# Altium PCB TIDA-00641_PCB.PcbDoc
Units mil, origin at the board's own origin, x right, y up, seen from the top; angles counter-clockwise.
Board outline 1800 x 1950 mil, 2 copper layers (Top Layer, Bottom Layer), stack 62 mil thick; 47 components, 47 nets, 167 pads, 110 vias.
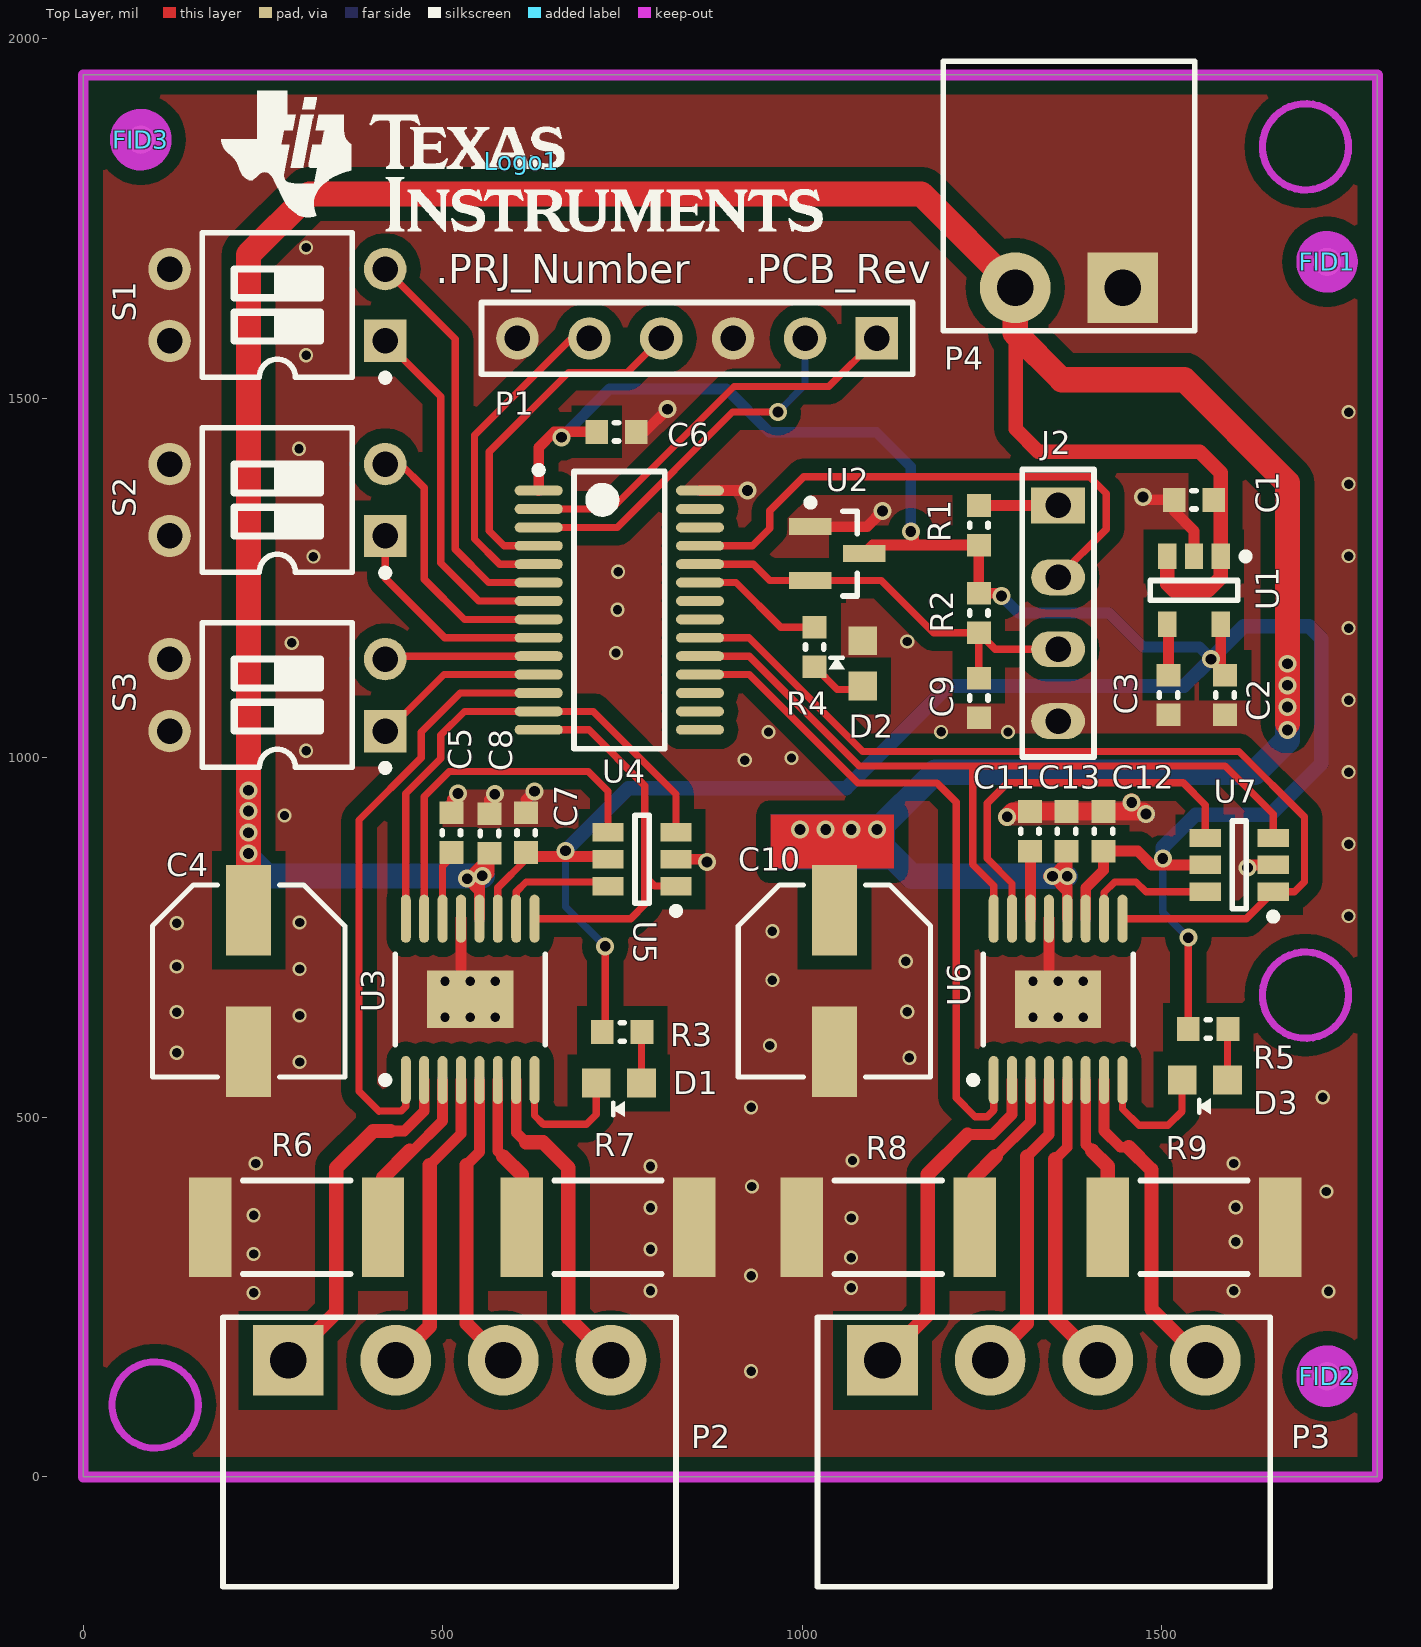
[diagram p0: Top Layer view]
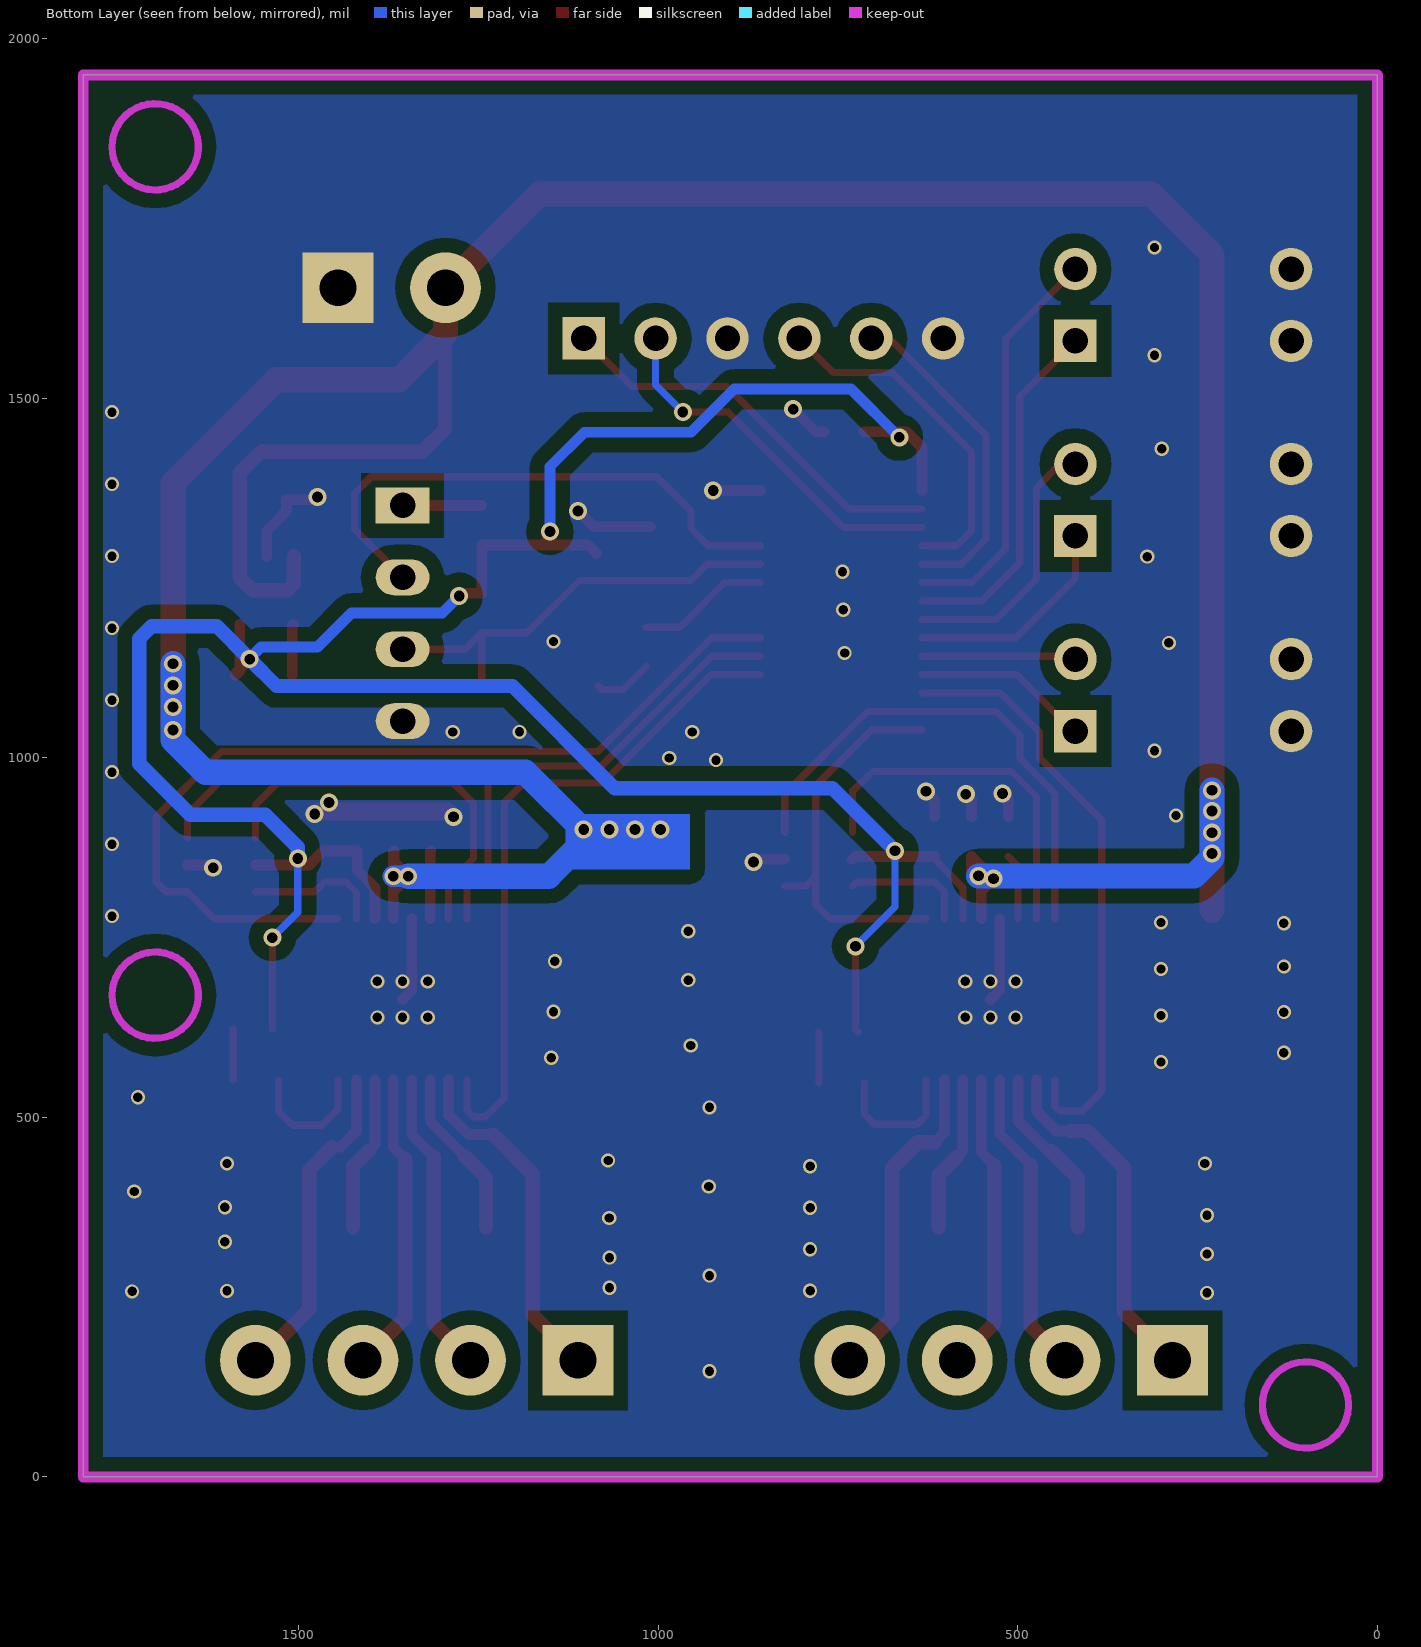
[diagram p1: Bottom Layer view, seen from below]

## Layer stack, top to bottom
Top Solder: solder mask 0.4, Solder Resist, Dk 3.5
Top Layer: signal copper 1.4
Dielectric1: core 59.2, FR-4, Dk 4.8
Bottom Layer: signal copper 1.4
Bottom Solder: solder mask 0.4, Solder Resist, Dk 3.5

## Board outline
0,0 1800,0 1800,1950 0,1950

## Design rules (kind name [scope] priority, off if disabled: settings)
AcuteAngle [All] p1: minimum=4.50000000000000E+0001 checktracksonly=FALSE
AssemblyTestPointUsage [All] p1: valid=2
Clearance Clearance_Keepouts [((IsTrack Or IsArc) And Not InPoly) And IsFree and IsKeepOut vs ((IsTrack Or IsArc) And Not InPoly) And IsFree and IsKeepOut] p1: gap=0
Clearance Clearance_BoardEdge_MountingHoles [OnCopper and InComponentClass('Mounting Holes') vs IsKeepOut] p2: gap=40
Clearance Clearance_BoardEdge_Poly [OnCopper and InPoly vs IsKeepOut] p3: gap=20
Clearance Clearance_BoardEdge [OnCopper and Not InComponentClass('Logo') and not InComponentClass('FiducialMark') and not InRegion(1000,500,4000,800) and Not IsKeepout vs IsKeepOut] p4: gap=20
Clearance Clearance_Poly [InPolygon] p5: gap=20
Clearance [All] p6: gap=8
ComponentClearance ComponentClearance_MountingHoles_FiducialMarks [InComponentClass('Mounting Holes') vs InComponentClass('FiducialMark')] p1 off: gap=50 collisioncheckmode=3 verticalgap=10 showdistances=FALSE
ComponentClearance ComponentClearance_Shunt [InComponentClass('Header') vs InComponentClass('Shunt')] p2 off: gap=0 collisioncheckmode=3 verticalgap=0 showdistances=FALSE
ComponentClearance ComponentClearance_Logo [InComponentClass('Logo')] p3 off: gap=50 collisioncheckmode=3 verticalgap=10 showdistances=FALSE
ComponentClearance ComponentClearance_ScrewToNut [(HasFootprint('NY PMS 440 0025 PH')) vs (HasFootprint('Keystone_1902C'))] p4 off: gap=5 collisioncheckmode=3 verticalgap=10 showdistances=FALSE
ComponentClearance ComponentClearance_MountingHoles [InComponentClass('Mounting Holes')] p5 off: gap=250 collisioncheckmode=3 verticalgap=100000 showdistances=FALSE
ComponentClearance ComponentClearance_SmallPassives [HasFootprint('0201*') or HasFootprint('0402*') or HasFootprint('0508') or HasFootprint('0603*') or HasFootprint('0612') or HasFootprint('0805*') or HasFootprint('0815*') or HasFootprint('0830*') or HasFootprint('1206*') or HasFootprint('1210*') or HasFootprint('1808*') or HasFootprint('1812*') or HasFootprint('1825*') or HasFootprint('2010*') or HasFootprint('2220*') or HasFootprint('2225*') or HasFootprint('2512*') or HasFootprint('2728*') or HasFootprint('3518*') vs HasFootprint('0201*') or HasFootprint('0402*') or HasFootprint('0508') or HasFootprint('0603*') or HasFootprint('0612') or HasFootprint('0805*') or HasFootprint('0815*') or HasFootprint('0830*') or HasFootprint('1206*') or HasFootprint('1210*') or HasFootprint('1808*') or HasFootprint('1812*') or HasFootprint('1825*') or HasFootprint('2010*') or HasFootprint('2220*') or HasFootprint('2225*') or HasFootprint('2512*') or HasFootprint('2728*') or HasFootprint('3518*')] p6 off: gap=20 collisioncheckmode=3 verticalgap=10 showdistances=FALSE
ComponentClearance ComponentClearance_THtoSMT [IsThruComponent vs IsSMTComponent] p7 off: gap=100 collisioncheckmode=3 verticalgap=30 showdistances=FALSE
ComponentClearance ComponentClearance_THtoTH [IsThruComponent vs IsThruComponent] p8 off: gap=118.11 collisioncheckmode=3 verticalgap=30 showdistances=FALSE
ComponentClearance [All] p9 off: gap=0 collisioncheckmode=3 verticalgap=10 showdistances=FALSE
DiffPairsRouting [All] p1: maxlimit=100 minlimit=10 mostfreqgap=10 toplayer_minwidth=15 toplayer_maxwidth=15 toplayer_prefwidth=15 bottomlayer_minwidth=15 bottomlayer_maxwidth=15 bottomlayer_prefwidth=15 maxuncoupledlength=1000
FabricationTestPointUsage TestPointUsage [All] p1: valid=2 allowmultiple=FALSE
FabricationTestpoint Testpoint [All] p1: side=3 testpointundercomponent=TRUE minsize=40 maxsize=100 preferedsize=60 minholesize=0 maxholesize=40 preferedholesize=32 testpointgrid=1 allowsidetop=TRUE allowsidebottom=TRUE usegrid=TRUE gridtolerance=0.01
FanoutControl Fanout_LCC [IsLCC] p1: bgadir=Out bgaviamode=Centered fanoutstyle=Auto fanoutdirection=Alternating viagrid=1 // Fanout_LCC (Default Rule)
FanoutControl Fanout_BGA [IsBGA] p2: bgadir=Out bgaviamode=Centered fanoutstyle=Auto fanoutdirection=Alternating viagrid=1 // Fanout_BGA (Default Rule)
FanoutControl Fanout_Default [All] p4: bgadir=Out bgaviamode=Centered fanoutstyle=Auto fanoutdirection=Alternating viagrid=1 // Fanout_Default (Default Rule)
FanoutControl Fanout_Small [(CompPinCount < 5)] p5: bgadir=Out bgaviamode=Centered fanoutstyle=Auto fanoutdirection=OutThenIn viagrid=1 // Fanout_Small (Default Rule)
HoleSize [All] p1: absolutevalues=TRUE maxlimit=251 minlimit=8 maxpercent=80.000 minpercent=20.000
MinimumAnnularRing MinimumAnnularRing_ThermalPadVias [IsVia and InAnyComponent] p1: minimumring=5.91
MinimumAnnularRing [All] p2: minimumring=9
PlaneConnect [All] p1: planeconnectstyle=Relief reliefexpansion=10 reliefentries=4 reliefconductorwidth=10 reliefairgap=10
PolygonConnect [All] p1: connectstyle=Direct reliefconductorwidth=10 reliefentries=4 polygonreliefangle="90 Angle" airgapwidth=10
RoutingVias ThermalPadVias [IsVia and InAnyComponent] p1 off: holewidth=7.87 width=19.68 viastyle="Through Hole" minholewidth=7.87 minwidth=19.68 maxholewidth=12.99 maxwidth=23.62
RoutingVias [All] p2 off: holewidth=16 width=34 viastyle="Through Hole" minholewidth=7.87 minwidth=26 maxholewidth=40 maxwidth=65
SilkToBoardRegionClearance [Not ((IsComment or IsDesignator) And (Hide <> 'False')) and not InRegion(1000,500,4000,800)] p1:
SilkToSilkClearance SilkToSilkClearance_Pb-FreeLogo [(HasFootprint('Pb-Free_Overlay_Medium') OR HasFootprint('Pb-Free_Overlay_Small')) vs (HasFootprint('Pb-Free_Overlay_Medium') OR HasFootprint('Pb-Free_Overlay_Small'))] p1: silktosilkclearance=0
SilkToSilkClearance [All] p2: silktosilkclearance=4
SolderMaskExpansion [All] p1: expansion=1.97
UnpouredPolygon [All] p1: allowunpoured=FALSE
Width [All] p1: maxlimit=100 minlimit=6 preferedwidth=10 checkconnectedcopper=TRUE
16 further rules are at their usual default settings.

## Classes and differential pairs
component class Logo: Logo1
component class TIDA-00641_TID_Hardware: FID1 FID2 FID3 Logo1 ZZ2 ZZ3 ZZ4
component class FiducialMark: FID1 FID2 FID3
component class AssemblyNote: ZZ2 ZZ3 ZZ4
component class Header: J2
component class TIDA-00641_BlankSheet: C1 C2 C3 C4 C5 C6 C7 C8 C9 C10 C11 C12 C13 D1 D2 D3 J2 P1 P2 P3 P4 R1 R2 R3 R4 R5 R6 R7 R8 R9 S1 S2 S3 U1 U2 U3 U4 U5 U6 U7

## Components (designator, comment, footprint, x,y, rotation, side; value= is the part's Value field where it differs from the comment)
C1 "C0603C105K4PACTU" 0603L 1544.88,1359.06 r180 top
C2 "C0603C225K8PACTU" 0603L 1588.19,1087.4 r90 top
C3 "C0603C103J5RACTU" 0603L 1509.45,1087.4 r270 top
C4 "EEE-FK1E470P" SM_RADIAL_D 229.92,689.76 r270 top
C5 "C0603C225M8PACTU" 0603L 512,896 r90 top
C6 "C0603C104K4RACTU" 0603L 741.73,1453.54 r180 top
C7 "06033C104KAT2A" 0603L 616,896 r270 top
C8 "06033C104KAT2A" 0603L 565,895 r270 top
C9 "C0603C102K5RACTU" 0603L 1245.67,1083.46 r90 top
C10 "EEE-FK1E470P" SM_RADIAL_D 1044.88,689.76 r270 top
C11 "C0603C225K8PACTU" 0603L 1316.54,897.93 r90 top
C12 "06033C104KAT2A" 0603L 1418.9,897.93 r270 top
C13 "06033C104KAT2A" 0603L 1367.72,897.93 r270 top
D1 "LTST-C190KRKT" LED603RED 745.67,548.03 r0 top
D2 "LTST-C190GKT" LED603GRN 1084.25,1130.71 r270 top
D3 "LTST-C190KRKT" LED603RED 1560.63,551.97 r0 top
FID1 "Fiducial" Fiducial10-20 1730,1690 r0 top
FID2 "Fiducial" Fiducial10-20 1730,140 r0 top
FID3 "Fiducial" Fiducial10-20 80,1860 r0 top
J2 "TSW-104-07-G-S" HDR1X4 1355.91,1351.18 r270 top
Logo1 "Texas Instruments" TI_Stacked_Overlay_Small 610,1830 r0 top
P1 "Header 6" HDR1X6 1103.94,1583.46 r180 top
P2 "Header 4" J4-3.81 509.45,162.2 r0 top
P3 "Header 4" J4-3.81 1336.22,162.2 r0 top
P4 "Header 2" j2-3.81 1371,1654 r180 top
R1 "ERJ-3GEY0R00V" 0603L 1245.67,1323.62 r90 top
R2 "CRCW060347K0JNEA" 0603L 1245.67,1201.57 r270 top
R3 "RC0603FR-07390RL" 0603L 749.61,618.9 r180 top
R4 "RC0603FR-07390RL" 0603L 1017.32,1154.33 r90 top
R5 "RC0603FR-07390RL" 0603L 1564.57,622.83 r180 top
R6 "CSRN2512FKR250" 2512M 296.85,347.24 r0 top
R7 "CSRN2512FKR250" 2512M 729.92,347.24 r180 top
R8 "CSRN2512FKR250" 2512M 1119.68,347.24 r0 top
R9 "CSRN2512FKR250" 2512M 1544.88,347.24 r180 top
S1 "SW DIP-2" DIP-4 270,1630 r180 top
S2 "SW DIP-2" DIP-4 270,1358.7 r180 top
S3 "SW DIP-2" DIP-4 270,1087.4 r180 top
U1 "LP2985-33DBVT" MF05A_L 1544.88,1233.07 r270 top
U2 "TLV803S" SOT-23 1048.82,1284.25 r0 top
U3 "DRV8848" PW0016S 538.19,664.17 r90 top
U4 "MSP430G2553IPW28" PW0028A_N 745.67,1205.51 r0 top
U5 "SN74LVC2G14" DBV0006A_N 777.17,859.06 r180 top
U6 "DRV8848" PW0016S 1355.91,664.17 r90 top
U7 "SN74LVC2G14" DBV0006A_N 1607.87,851.18 r180 top
ZZ2 "These assemblies are ESD sensitive, ESD precautions shall be observed." AssemblyNote 185,3829.11 r0 top
ZZ3 "These assemblies must be clean and free from flux and all contaminants. Use of no clean flux is not acceptable." AssemblyNote 185,3740.56 r0 top
ZZ4 "These assemblies must comply with workmanship standards IPC-A-610 Class 2, unless otherwise specified." AssemblyNote 185,3652 r0 top

## Footprints (in the part's own frame and the unit in brackets; to place one, negate y for a bottom-side part, rotate by r counter-clockwise, add the part's x,y. Pads: shape width x height; smd on the part's side, far side on the other; paste and mask are expansions set on the pad)
0603L [mm] "0603 from SM-752 data"
  rect 0.8x0.85 smd: 1(-0.7,0) 2(0.7,0)
  silkscreen extent -0.07,-0.33 0.07,0.33, body extent -0.87,-0.47 0.87,0.47, height 0.85
2512M [mm] "Chip Resistor, Body 6.3x3.2mm, IPC Low Density"
  rect 1.5x3.5 smd: 1(-3.05,0) 2(3.05,0)
  silkscreen extent -1.9,-1.65 1.9,1.65, body extent -3.22,-1.67 3.22,1.67, height 0.71
AssemblyNote [mil] "Assembly Note"
DBV0006A_N [mm] "SOT23, 6-Leads, Body 2.9x1.6mm, Pitch 0.95mm, Lead Span 2.8mm, IPC Medium Density"
  rect 1.1x0.65 smd: 1(-1.2,0.95) 2(-1.2,0) 3(-1.2,-0.95) 4(1.2,-0.95) 5(1.2,0) 6(1.2,0.95)
  silkscreen extent -1.33,-1.55 0.25,1.95, body extent -0.87,-1.52 0.87,1.53, height 1.45
DIP-4 [mm] "DIP; 4 Leads; Row Spacing 7.62 mm; Pitch 2.54 mm"
  rect 1.5x1.5 hole 0.9: 1(-3.81,1.27)
  round 1.5 hole 0.9: 2(-3.81,-1.27) 3(3.81,-1.27) 4(3.81,1.27)
  silkscreen extent -3.94,-2.55 2.65,2.69, body extent -3.15,-2.5 3.15,2.5, height 5.6
Fiducial10-20 [mm]
  round 1 smd mask+0.5: 1(0,0)
  Top Layer keep-out circle w1.178: c0,0 r0.5
HDR1X4 [mm] "Connector; Header; 4 Position"
  rect 1.27x1.9 hole 0.9: 1(0,0)
  oval 1.27x1.9 hole 0.9: 2(2.54,0) 3(5.08,0) 4(7.62,0)
  silkscreen extent -1.27,-1.27 8.89,1.27
HDR1X6 [mm] "Connector; Header; 6 Position"
  rect 1.5x1.5 hole 0.9: 1(0,0)
  round 1.5 hole 0.9: 2(2.54,0) 3(5.08,0) 4(7.62,0) 5(10.16,0) 6(12.7,0)
  silkscreen extent -1.27,-1.27 13.97,1.27
j2-3.81 [mm] "Connector; Header; 4 Position"
  rect 2.5x2.5 hole 1.3: 1(-1.9,0)
  round 2.5 hole 1.3: 2(1.9,0)
  silkscreen extent -4.44,-8 4.45,1.52
J4-3.81 [mm] "Connector; Header; 4 Position"
  rect 2.5x2.5 hole 1.3: 1(-5.7,0)
  round 2.5 hole 1.3: 2(-1.9,0) 3(1.9,0) 4(5.7,0)
  silkscreen extent -8,-8 8,1.52
LED603GRN [mil]
  rect 40x40 smd: 1(-32.2,-0.1) 2(30.8,-0.1)
  silkscreen extent -10,-47 7,-25, body extent -26,-29 26,29, height 43
LED603RED [mil]
  rect 40x40 smd: 1(-32.2,-0.1) 2(30.8,-0.1)
  silkscreen extent -10,-47 7,-25, body extent -26,-29 26,29, height 43
MF05A_L [mm] "SOT23, 5-Leads, Body 2.9x1.6mm, Pitch 0.95mm, Lead Span 2.8mm, IPC High Density"
  rect 0.9x0.65 smd: 1(-1.2,0.95) 2(-1.2,0) 3(-1.2,-0.95) 4(1.2,-0.95) 5(1.2,0.95)
  silkscreen extent -1.32,-1.55 0.35,1.95, body extent -0.9,-1.55 0.9,1.55, height 1.19
PW0016S [mm]
  oval 1.7x0.35 smd: 1(-2.85,2.275) 2(-2.85,1.625) 3(-2.85,0.975) 4(-2.85,0.325) 5(-2.85,-0.325) 6(-2.85,-0.975) 7(-2.85,-1.625) 8(-2.85,-2.275) 9(2.85,-2.275) 10(2.85,-1.625) 11(2.85,-0.975) 12(2.85,-0.325) 13(2.85,0.325) 14(2.85,0.975) 15(2.85,1.625) 16(2.85,2.275)
  rect 2.032x3.048 smd: 17(0,0)
  silkscreen extent -2.97,-2.65 1.6,3.12, body extent -3.21,-2.5 3.21,2.5, height 0.99
PW0028A_N [mm] "TSOP, 28-Leads, Body 9.7x4.4mm, Pitch 0.65mm, IPC Medium Density"
  oval 1.7x0.35 smd: 1(-2.85,4.225) 2(-2.85,3.575) 3(-2.85,2.925) 4(-2.85,2.275) 5(-2.85,1.625) 6(-2.85,0.975) 7(-2.85,0.325) 8(-2.85,-0.325) 9(-2.85,-0.975) 10(-2.85,-1.625) 11(-2.85,-2.275) 12(-2.85,-2.925) 13(-2.85,-3.575) 14(-2.85,-4.225) 15(2.85,-4.225) 16(2.85,-3.575) 17(2.85,-2.925) 18(2.85,-2.275) 19(2.85,-1.625) 20(2.85,-0.975) 21(2.85,-0.325) 22(2.85,0.325) 23(2.85,0.975) 24(2.85,1.625) 25(2.85,2.275) 26(2.85,2.925) 27(2.85,3.575) 28(2.85,4.225)
  silkscreen extent -2.97,-4.9 1.6,5.07, body extent -2.25,-4.9 2.25,4.9, height 1.2
SM_RADIAL_D [mm] "6.3 x 5.8mm:  Panasonic D"
  rect 3.2x1.6 smd: 1(-2.5,0) 2(2.5,0)
  silkscreen extent -3.4,-3.4 3.4,3.4, body extent -3.41,-3.41 3.41,3.41, height 6.1
SOT-23 [mm] "SOT23, 3-Leads, Body 2.9x1.3mm, Pitch 0.95mm, Lead Span 2.5mm, IPC Medium Density"
  rect 1.5x0.6 smd: 1(-0.95,0.95) 2(-0.95,-0.95) 3(0.95,0)
  silkscreen extent -1.07,-1.5 0.7,1.92, body extent -1.16,-1.45 1.21,1.45, height 1
TI_Stacked_Overlay_Small [mil]
  silkscreen extent -418,-98 418,98

## Part data
C1: "CAP, CERM, 1uF, 16V, +/-10%, X5R, 0603"
C2 C11: "CAP, CERM, 2.2uF, 10V, +/-10%, X5R, 0603"
C3: "CAP, CERM, 0.01uF, 50V, +/-5%, X7R, 0603"
C4 C10: "CAP, AL, 47uF, 25V, +/-20%, 0.36 ohm, SMD"
C5: "CAP, CERM, 2.2uF, 10V, +/-20%, X5R, 0603"
C6: "CAP, CERM, 0.1uF, 16V, +/-10%, X7R, 0603"
C7 C8 C12 C13: "CAP, CERM, 0.1uF, 25V, +/-10%, X7R, 0603"
C9: "CAP, CERM, 1000pF, 50V, +/-10%, X7R, 0603"
D1 D3: library part D_LED_603_GRN, "LED SUPER RED CLEAR 0603 SMD"
D2: library part D_LED_603_GRN, "Diode, LED, Green, 2.1-V, 20-mA, 6-mcd"
FID1 FID2 FID3: "Fiducial mark.  There is nothing to buy or mount."
J2: "Header, TH, 100mil, 4x1, Gold plated, 230 mil above insulator"
Logo1: library part TI_Logo, "Texas Instrument Corporate Signature"
P1: "Header, 6-Pin"
P2 P3: "Header, 4-Pin"
P4: "Header, 2-Pin"
R1: "RES, 0 ohm, 5%, 0.1W, 0603"
R2: "RES, 47k ohm, 5%, 0.1W, 0603"
R3 R4 R5: "RES, 390 ohm, 1%, 0.1W, 0603"
R6 R7 R8 R9: "RES, 0.25 ohm, 1%, 2W, 2512"
S1 S2 S3: "SWITCH TIN CONT 2 SEC 50V"
U1: library part LP2985IM5-3.3, "Micropower 150 mA Low-Noise Ultra Low-Dropout Regulator, 5-pin SOT-23"
U2: library part TLV803DBZ, "IC VOLT SUPERVISR 2.93V SOT23-3"
U3 U6: library part DRV8848PWP, "IC MOTOR DRIVER PAR 16HTSSOP"
U4: "IC MCU 16BIT 16KB FLASH 28TSSOP"
U5 U7: "Dual Schmitt-Trigger Inverter"
ZZ2 ZZ3 ZZ4: library part AssemblyNote

## Via types
v1: diameter 19.68, hole 13, Top Layer to Bottom Layer, 73 vias
v2: diameter 25, hole 15, Top Layer to Bottom Layer, 37 vias

## Nets (pads, with @x,y where several pads share a name; then routed paths per layer and width w, separated by ;. In a path a pad name is that pad's centre, name@x,y a point inside that pad or via, vN(x,y) a via of type N, cw(c..) or ccw(c..) an arc to the next point about the centre after c; other vN are vias at no path point)
DIR1: P1.2 U4.3 | length 517.1
  Top Layer w10: U4.3 742.72,1320.67 903.15,1481.1 v2(966.14,1481.1)
  Bottom Layer w10: v2(966.14,1481.1) 1003.94,1518.9 P1.2
DIR2: P1.5 U4.5 | length 463.6
  Top Layer w10: U4.5 579.33,1269.49 544.21,1304.61 544.21,1448.94 678.74,1583.46 P1.5
DRV1-AIN1-TA11: U3.16 U4.13 U5.3 | length 717.3
  Top Layer w10: U3.16 448.62,950.46 497.28,999.11 497.28,1031.92 530.12,1064.76 U4.13 709.25,1064.76 824.41,949.61 U5.3
DRV1-AIN2: U3.15 U5.4 | length 508.5
  Top Layer w10: U3.15 474.21,946.23 509.09,981.1 702.36,981.1 729.92,953.54 U5.4
DRV1-AOUT1: P2.1 U3.2 | length 493.5
  Top Layer w15: 427.36,481.1 446.46,481.1 474.21,508.86 U3.2
  Top Layer w20: P2.1 351.97,229.13 351.97,429.92 403.15,481.1 427.36,481.1
DRV1-AOUT2: P2.2 U3.4 | length 427.4
  Top Layer w15: 481.89,433.86 525.39,477.36 U3.4
  Top Layer w20: P2.2 481.89,209.45 481.89,433.86
DRV1-BIN1-TA12: U3.9 U4.14 U5.1 | length 555.7
  Top Layer w10: U3.9 761.42,776.38 781.1,796.06 781.1,835.43 ; U4.14 703.35,1039.17 781.1,961.42 781.1,835.43 ; U5.1 794.88,821.65 781.1,835.43
DRV1-BIN2: U3.10 U5.6 | length 173.4
  Top Layer w10: U3.10 602.17,813.98 615.75,827.56 724.02,827.56 U5.6
DRV1-BOUT1: P2.4 U3.7 | length 458.2
  Top Layer w15: U3.7 602.17,478.94 615.75,465.35
  Top Layer w20: 615.75,465.35 639.37,465.35 674.8,429.92 674.8,221.26 P2.4
DRV1-BOUT2: P2.3 U3.5 | length 418.4
  Top Layer w15: 533.07,433.86 550.98,451.77 U3.5
  Top Layer w20: 533.07,433.86 533.07,213.39 P2.3
DRV1-NSLEEP: U3.1 U4.12 | length 837.7
  Top Layer w10: U3.1 448.62,515.09 442.36,508.82 411.38,508.82 411.22,508.66 383.46,536.42 383.46,913.58 470.08,1000.2 470.08,1036.22 524.21,1090.35 U4.12
DRV2-AIN1-TA01: U4.19 U6.16 U7.3 | length 1146.5
  Top Layer w10: U4.19 926.24,1141.54 1078.8,988.98 1588.19,988.98 1655.12,922.05 U7.3 ; 1237.8,988.98 1237.26,988.44 1237.26,851.72 1266.34,822.64 U6.16
DRV2-AIN2: U6.15 U7.4 | length 548.8
  Top Layer w10: U6.15 1291.93,825.33 1257.26,860 1257.26,936.85 1285.76,965.35 1529.98,965.35 1560.63,934.71 U7.4
DRV2-AOUT1: P3.1 U6.2 | length 484.5
  Top Layer w15: 1229.92,476.18 1264.25,476.18 1291.93,503.86 U6.2
  Top Layer w20: P3.1 1174.8,225.2 1174.8,421.06 1229.92,476.18
DRV2-AOUT2: P3.2 U6.4 | length 423.6
  Top Layer w15: 1312.6,445.67 1343.11,476.18 U6.4
  Top Layer w20: P3.2 1312.6,213.39 1312.6,445.67
DRV2-BIN1-TA02: U4.20 U6.9 U7.1 | length 1308.4
  Top Layer w10: U4.20 926.1,1167.13 1084.25,1008.98 1607.56,1008.98 1698.43,918.11 1698.43,827.56 1684.65,813.78 U7.1 1617.72,776.38 U6.9
DRV2-BIN2: U6.10 U7.6 | length 189
  Top Layer w10: U6.10 1419.88,812.8 1434.65,827.56 1464.37,827.56 1478.15,813.78 U7.6
DRV2-BOUT1: P3.4 U6.7 | length 457.3
  Top Layer w15: U6.7 1419.88,481.1 1442.52,458.46 1454.33,458.46
  Top Layer w20: 1454.33,458.46 1485.83,426.97 1485.83,233.07 1556.69,162.2 P3.4
DRV2-BOUT2: P3.3 U6.5 | length 421.2
  Top Layer w15: 1351.97,441.73 1368.7,458.46 U6.5
  Top Layer w20: 1351.97,441.73 1351.97,221.26 P3.3
DRV2-NSLEEP: U4.18 U6.1 | length 949.6
  Top Layer w10: U4.18 926.37,1115.94 1077,965.32 1187.14,965.32 1214.17,938.28 1214.17,828.14 1214.17,527.28 1240.45,501.01 1257.26,501.01 1266.34,510.09 U6.1
GND: C1.2 C2.1 C3.2 C4.2 C5.2 C6.1 C7.1 C8.1 C9.1 C10.2 C11.2 C12.1 C13.1 D2.1 J2.4 P1.3 P1.6 P4.1 R6.1 R7.1 R8.1 R9.1 S1.3 S1.4 S2.3 S2.4 S3.3 S3.4 U1.2 U2.1 U3.13 U3.17 U4.28 U5.2 U6.13 U6.17 U7.2 | length 1006.1
  Top Layer w15: C5.2@513.39,918.11 513.39,942.58 v2(521.26,950.46) ; U3.13 525.39,676.97 U3.17 ; C8.1@564.57,918.11 564.57,941.73 v2(572.44,949.61) ; C7.1@615.75,918.11 615.75,941.54 v2(627.76,953.54) ; C6.1 781.1,1453.54 v2(812.6,1485.04) ; U5.2 863.78,859.06 v2(867.72,855.12) ; U4.28 v2(923.82,1371.85) ; U2.1 1090.16,1321.65 v2(1111.81,1343.31) ; U6.13 1343.11,676.97 U6.17 ; v2(1474.02,1362.99) 1477.95,1359.06 C1.2 1517.32,1343.31 1544.88,1315.75 U1.2 ; v2(1619.27,847.24) 1623.21,851.18 U7.2
  Top Layer w25: v2(1285.04,918.11) 1292.42,925.49 C11.2 v2@1458.27,925.49 ; v2(1458.27,937.85) v2@1458.27,925.49 ; v2(1478.15,922.05) 1474.71,925.49 v2@1458.27,925.49
  Bottom Layer w15: v2(923.82,1371.85) v2@925,1371.85
  other v1: 929,147 237,256 1732,258 789,259 1600,258.66 1068,263 929,280 1068,305 237,310 789,316.67 1603,327 1068.33,360 237,364 789,374.33 1603,375 1729,397 930,404 789,432 240,435.83 1600,435.83 1070,440 929,514 1724,528 301,577 1149,583 130,590 955.07,599.95 503.19,639.17 538.19,639.17 573.19,639.17 1320.91,639.17 1355.91,639.17 1390.91,639.17 301,641.67 130,646.46 1146,647 503.19,689.17 538.19,689.17 573.19,689.17 1320.91,689.17 1355.91,689.17 1390.91,689.17 958.44,691 301,706.33 130,710 1144,717.2 958.44,759 130,770 301,771 1760,780 1760,880.14 280,920 1760,980.29 920,997 985,1000 310,1010 953,1036 1193.16,1036.22 1286.12,1036 1760,1080.43 741,1146 290,1160 1146,1162 1760,1180.57 743,1206 744,1259 320,1280 1760,1280.71 1760,1380.86 300,1430 1760,1481 310,1560 310,1710
NetC3_1: C3.1 U1.4 | length 71.7
  Top Layer w15: U1.4 1509.45,1183.86 C3.1
NetC5_1: C5.1 U3.14 | length 92.2
  Top Layer w10: U3.14 499.8,849.41 C5.1@513.39,862.99
NetC11_1: C11.1 U6.14 | length 94.4
  Top Layer w15: C11.1 1317.52,869.39 U6.14
NetD1_1: D1.1 U3.8 | length 189.8
  Top Layer w10: U3.8 627.76,502.56 639.96,490.35 699.8,490.35 713.47,504.02 D1.1
NetD1_2: D1.2 R3.1 | length 71.3
  Top Layer w10: D1.2 776.47,618.2 R3.1
NetD2_2: D2.2 R4.1 | length 81.8
  Top Layer w10: R4.1 1048.82,1095.28 1079.52,1095.28 D2.2
NetD3_1: D3.1 U6.8 | length 183.9
  Top Layer w10: U6.8 1445.47,511.81 1468.31,488.98 1508.74,488.98 1528.43,508.66 D3.1
NetD3_2: D3.2 R5.1 | length 71.3
  Top Layer w10: D3.2 1591.43,622.14 R5.1
NetR6_2: R6.2 U3.3 | length 237.4
  Top Layer w15: 458.27,453.54 499.8,495.08 U3.3
  Top Layer w20: R6.2 416.93,416.14 454.33,453.54
NetR7_2: R7.2 U3.6 | length 218.5
  Top Layer w15: U3.6 576.57,453.35 584.25,445.67
  Top Layer w20: 584.25,445.67 609.84,420.08 R7.2
NetR8_2: R8.2 U6.3 | length 236.9
  Top Layer w15: 1269.29,445.87 1317.52,494.09 U6.3
  Top Layer w20: R8.2 1239.76,416.34 1269.29,445.87
NetR9_2: R9.2 U6.6 | length 217.4
  Top Layer w15: U6.6 1394.29,462.4 1403.15,453.54
  Top Layer w20: 1403.15,453.54 1424.8,431.89 R9.2
P1.4: S1.2 U4.6 | length 565.3
  Top Layer w10: S1.2 517.32,1582.68 517.32,1290.35 563.78,1243.9 U4.6
P1.5: S1.1 U4.7 | length 498.9
  Top Layer w10: S1.1 497.32,1502.68 497.32,1271.18 550.2,1218.31 U4.7
P2.0: S3.2 U4.10 | length 211.9
  Top Layer w10: S3.2@423.23,1137.4 427.36,1141.54 U4.10
P2.1: S3.1 U4.11 | length 242.8
  Top Layer w10: S3.1@423.23,1037.4 501.77,1115.94 U4.11
P3.0: S2.1 U4.9 | length 306.5
  Top Layer w10: S2.1 420,1250 502.87,1167.13 U4.9
P3.1: S2.2 U4.8 | length 377.4
  Top Layer w10: S2.2 441.3,1408.7 474.21,1375.79 474.21,1248.62 530.12,1192.72 U4.8
SBWTCK: J2.2 U4.25 | length 773.2
  Top Layer w10: U4.25 930.71,1295.08 954.72,1319.09 954.72,1343.7 1002.2,1391.18 1399.52,1391.18 1422.83,1367.87 1422.83,1318.11 J2.2
SBWTDIO: C9.2 J2.3 R2.2 U2.2 U4.24 | length 610
  Top Layer w10: U4.24 932.09,1269.49 954.72,1246.85 U2.2 1109.84,1246.85 1182.68,1174.02 R2.2 ; C9.2 R2.2 ; J2.3 1268.5,1151.18 R2.2
STATUS: R4.2 U4.23 | length 185.1
  Top Layer w10: U4.23 908.07,1243.9 970.08,1181.89 R4.2
STEP1: P1.1 U4.2 | length 568.7
  Top Layer w10: U4.2 734.84,1346.26 905.12,1516.54 1037.01,1516.54 P1.1
STEP2: P1.4 U4.4 | length 492.3
  Top Layer w10: U4.4 585.24,1295.08 564.57,1315.75 564.57,1425.98 674.8,1536.22 756.69,1536.22 P1.4
V3P3: C2.2 C6.2 C7.2 C12.2 R1.1 R2.1 R3.2 R5.2 U1.5 U2.3 U3.11 U4.1 U5.5 U6.11 U7.5 | length 4192.6
  Top Layer w10: U3.11 576.57,819.56 615.75,858.73 C7.2@615.75,862.99 ; R3.2 726,622.85 v2(726,738) ; R5.2 v2(1537,750)
  Top Layer w15: C7.2@615.75,862.99 v2@670.87,862.99 ; U4.1 633.46,1431.89 655.12,1453.54 C6.2 ; v2(670.87,870.87) v2@670.87,862.99 ; U5.5 725.98,862.99 v2@670.87,862.99 ; U2.3 1098.03,1296.06 1155,1296.06 ; v2(1151,1315) 1155,1311 1155,1296.06 ; v2(1277.17,1225.2) 1281.1,1229.13 R2.1 R1.1 1155,1296.06 ; U6.11 1394.29,819.27 1418.9,843.87 C12.2 1466.64,870.37 1485.83,851.18 v2@1497.64,851.18 ; v2(1501.57,860) 1497.64,856.06 v2@1497.64,851.18 ; U7.5 v2@1497.64,851.18 ; v2(1568.5,1137.4) C2.2@1582.28,1123.62 ; U1.5 C2.2@1582.28,1123.62 ; C2.2@1582.28,1123.62 1588.19,1117.72 C2.2 1582.28,1120.87 C2.2@1582.28,1123.62
  Bottom Layer w10: v2(670.87,870.87) 670.87,793.13 v2(726,738) ; v2(1501.57,860) 1501.57,785.43 v2(1537,750)
  Bottom Layer w15: v2(665,1446) 732.04,1513.04 894.61,1513.04 954.54,1453.1 1102.9,1453.1 1151,1405 v2(1151,1315) ; v2(1277.17,1225.2) 1300.79,1201.57 1426.77,1201.57 1474.02,1154.33 1552.76,1154.33 1569.09,1137.99 v2@1572.44,1134.65
  Bottom Layer w20: v2(670.87,870.87) 758,958 1061,958 1203,1100 1531.1,1100 v2(1568.5,1137.4) 1569.09,1137.99 1614.1,1183 1705,1183 1722,1166 1722,992 1651,921 1547,921 1501.57,875.57 v2(1501.57,860)
VCCX: J2.1 R1.2 | length 110.2
  Top Layer w15: R1.2 J2.1
VM: C1.1 C4.1 C8.2 C10.1 C13.2 P4.2 U1.1 U1.3 U3.12 U6.12 | length 5598.7
  Top Layer w15: U3.12 550.98,815.02 ; C8.2@564.57,862.99 C8.2@564.57,862.57 ; v2@1342.52,835.43 v2(1348,835.43) ; U6.12 1368.7,815 ; 550.98,815.02 550.98,825.79 564.57,839.37 C8.2@564.57,862.57 ; 550.98,815.02 v2(534,832) C8.2@564.57,862.57 ; v2(1348,835.43) v2(1368.7,835.43) ; v2(1348,835.43) 1368.43,815 1368.7,815 ; v2(1348,835.43) 1367.72,855.15 C13.2 1368.7,869.39 v2(1368.7,835.43) ; 1368.7,815 v2(1368.7,835.43)
  Top Layer w20: P4.2@1296.85,1642 1296.85,1457.48 1328.35,1425.98 1552.76,1425.98 1582.28,1396.46 U1.1 1582.28,1250.79 1564.57,1233.07 1516.34,1233.07 1507.48,1241.93 U1.3
  Top Layer w35: C4.1 229.92,1699.92 314.56,1784.56 1165.63,1784.56 P4.2 1296.2,1590.8 1361,1526 1531.48,1526 1674.8,1382.68 v2@1674.8,1048.03 ; P4.2@1296,1659 P4.2@1296.85,1658.15
  Bottom Layer w30: v2@1026.25,898 v2@1106.25,898 ; v2(1348,835.43) v2(1368.7,835.43)
  Bottom Layer w35: v2(230,955) 230,861 255,836 v2(555,836) ; 1090,898 1152.57,835.43 v2(1348,835.43) ; v2@1099,894 1185,980 1630,980 1675,1025 v2(1675,1131)
  other v2: 230,867 230,896 997,900.5 1032.67,900.5 1068.33,900.5 1104,900.5 230,926 1675,1039 1675,1071 1675,1101
pads on no net: FID1.1 FID2.1 FID3.1 U4.15 U4.16 U4.17 U4.21 U4.22 U4.26 U4.27

## Polygon pours and split planes (outlines as drawn)
GND on Bottom Layer "GND Bottom" (solid, remove dead copper, pour order 4): -2.2,1943.37 1797.8,1943.37 1797.8,-3.63 -2.2,-3.63
GND on Top Layer "GND" (solid, remove dead copper, pour order 6): -2.89,1960.37 -2.89,4.37 1797.11,4.37 1797.11,1960.37

## Keep-outs
Keep-Out Layer:
  circle w10: c1700,670 r60
  circle w10: c100,100 r60
  circle w10: c1700,1850 r60
  lines w15: 0,0 1800,0 1800,1950 0,1950 0,0
  text ".Layer_Name" at 577,-858.49 h60

## Other copper
Top Layer:
  rectangle net VM: 956,846 1128,921
  text ".Layer_Name" at 577,-858.49 h60
Bottom Layer:
  rectangle net VM: 956,845 1129,922
  text ".Layer_Name" at 577,-858.49 h60

## Silkscreen, mask and mechanical layers (free items; w line width, h text height)
Top Overlay:
  text ".PRJ_Number" at 490,1660 h40
  text ".PCB_Rev" at 920,1660 h40
  text ".Layer_Name" at 577,-858.49 h60
Bottom Overlay:
  text ".Layer_Name" at 577,-858.49 h60
Top Paste:
  text ".Layer_Name" at 577,-858.49 h60
Bottom Paste:
  text ".Layer_Name" at 577,-858.49 h60
Top Solder:
  text ".Layer_Name" at 577,-858.49 h60
  text ".Layer_Name" at 577,-858.49 h60
Bottom Solder:
  text ".Layer_Name" at 577,-858.49 h60
Drill Guide:
  text ".Layer_Name" at 577,-858.49 h60
M1 Board Outline:
  the board outline again, w6.69
  text ".Layer_Name" at 577,-858.49 h60
M2 Board Dimensions:
  rectangle: 0,-275 125,-150
  rectangle: 125,-400 500,-275
  lines w7: 0,-275 1000,-275 ; 125,-400 125,-150 ; 250,-400 250,-150 ; 500,-400 500,-150 ; 750,-400 750,-150 ; 0,-400 1000,-400 1000,-150 0,-150 0,-400
  text ".Layer_Name" at 577,-858.49 h60
M3 3D STEP Top:
  text ".Layer_Name" at 577,-858.49 h60
M4 3D STEP Bottom:
  text ".Layer_Name" at 577,-858.49 h60
M5 Assembly Top:
  lines w10: -292,-930.17 6308,-930.17 ; -292,-726.83 6310,-726.83 ; -292,-523.5 -292,-1133.5 3713,-1133.5 6310,-1133.5 6310,-523.5 -291.5,-523.5 -291.5,-1133.5 1284,-1133.5 ; 2173,-1133.5 2173,-523.5 ; 3440,-726.83 3440,-523.5 ; 4280,-726.83 4280,-523.5 ; 4902,-1140 4902,-937.17
  text "COMPONENTS MARKED 'DNP' SHOULD NOT BE POPULATED." at 1153.5,-318.5 h60
  text "ASSEMBLY VARIANT:" at 1153,-434 h60
  text ".VariantName" at 2189,-434 h60
  text "PCB VIEWED FROM TOP SIDE" at -228.5,-655.67 h60
  text "BOARD #:" at 2248,-655.67 h60
  text ".PRJ_Number" at 2793.5,-655.67 h60
  text "REV:" at 3638,-655.67 h60
  text ".PCB_Rev" at 3929.5,-655.67 h60
  text "SVN REV:" at 4476,-655.67 h60
  text ".VersionControl_RevNumber" at 4982,-655.67 h60
  text "TID #:" at 2248,-859 h60
  text ".TID" at 2793.5,-859 h60
  text "PLOT NAME =" at -228.5,-1064.34 h60
  text ".plot_File_Name" at 577,-1064.34 h60
  text "GENERATED    :" at 2250,-1064.34 h60
  text ".Print_Date" at 3119.5,-1064.34 h60
  text ".Print_Time" at 3848.5,-1064.34 h60
  text "TEXAS INSTRUMENTS" at 5113,-1064.34 h60
M6 Assembly Bottom:
  lines w10: -292.5,-727.33 6309.5,-727.33 ; -290.5,-930.67 6309.5,-930.67 ; 1115.5,-1140.5 1115.5,-937.67 ; 1737.5,-727.33 1737.5,-524 ; 2577.5,-727.33 2577.5,-524 ; 3844.5,-1134 3844.5,-524 ; 4733.5,-1134 6309,-1134 6309,-524 -292.5,-524 -292.5,-1134 2304.5,-1134 6309.5,-1134 6309.5,-524
  text "COMPONENTS MARKED 'DNP' SHOULD NOT BE POPULATED." at 6102,-318 h60
  text ".VariantName" at 5058,-434 h60
  text "ASSEMBLY VARIANT:" at 6097,-434 h60
  text ".VersionControl_RevNumber" at 1035.5,-656.17 h60
  text "SVN REV:" at 1541.5,-656.17 h60
  text ".PCB_Rev" at 2088,-656.17 h60
  text "REV:" at 2379.5,-656.17 h60
  text ".PRJ_Number" at 3224,-656.17 h60
  text "BOARD #:" at 3769.5,-656.17 h60
  text "PCB VIEWED FROM BOTTOM SIDE" at 6246,-656.17 h60
  text ".TID" at 3224,-859.5 h60
  text "TID #:" at 3769.5,-859.5 h60
  text "TEXAS INSTRUMENTS" at 904.5,-1064.84 h60
  text ".Print_Time" at 2169,-1064.84 h60
  text ".Print_Date" at 2898,-1064.84 h60
  text "GENERATED    :" at 3767.5,-1064.84 h60
  text ".plot_File_Name" at 5440.5,-1064.84 h60
  text "PLOT NAME =" at 6246,-1064.84 h60
M9 Title Sheet:
  drawing of 57 lines, arcs and shapes, not listed
  text "1" at 739.84,8036.5 h70
  text "2" at 3235.5,8036.5 h70
  text "3" at 5724.84,8036.5 h70
  text "4" at 8231.51,8036.5 h70
  text "5" at 10730.5,8036.5 h70
  text "6" at 13235.5,8036.5 h70
  text "A" at -416.5,6893.5 h70
  text "A" at 14383.5,6893.5 h70
  text "B" at -416.5,4513.5 h70
  text "B" at 14383.5,4513.5 h70
  text "C" at -416.5,2138.5 h70
  text "C" at 14383.5,2138.5 h70
  text "PROJECT TITLE:" at 11343.5,277.5 h45
  text ".PRJ_Title" at 11393.5,144.17 h70
  text "DESIGNED FOR:" at 11343.5,-23.5 h45
  text ".PRJ_Customer" at 11393.5,-163.5 h70
  text "D" at -416.5,-231.5 h70
  text "D" at 14383.5,-231.5 h70
  text "FILE NAME:" at 11343.5,-323.5 h45
  text ".PCB_File_Name_No_Path" at 11393.5,-443.5 h70
  text "Texas Instruments (TI) and/or its licensors do not warrant the accuracy or completeness of this specification" at 6374,-605.34 h45
  text "ENGINEER:" at 11343.5,-613.5 h45
  text "LAYOUT BY:" at 12848.5,-613.5 h45
  text "or any information contained therein. TI and/or its licensors do not warrant that this design will meet" at 6329.01,-718 h45
  text ".PRJ_Engineer" at 11393.5,-768.49 h70
  text ".PCB_Layout" at 12899,-768.49 h70
  text "the specifications, will be suitable for your application or fit for any particular purpose, or will operate in" at 6329.01,-830.67 h45
  text ".Layer_Name" at 577,-858.49 h60
  text "ALTIUM DESIGNER VERSION:" at 12848.5,-923.5 h45
  text "an implementation. TI and/or its licensors do not warrant that the design is production worthy. You should" at 6329.01,-943.33 h45
  text "completely validate and test your design implementation to confirm the system functionality for your application." at 6374,-1056 h45
  text ".print_Scale" at 11393.5,-1056.83 h70
  text ".Application_BuildNumber" at 12899,-1056.83 h70
  text "1" at 739.84,-1263.5 h70
  text "2" at 3235.5,-1263.5 h70
  text "3" at 5724.84,-1263.5 h70
  text "4" at 8231.51,-1263.5 h70
  text "5" at 10730.5,-1263.5 h70
  text "6" at 13235.5,-1263.5 h70
M10 Fab Notes:
  drawing of 185 lines, arcs and shapes, not listed
  text "DESIGN INFORMATION" at 12381.02,5910 h60
  text "MIN. TRACK WIDTH:" at 11736.46,5730 h60
  text "8" at 12832.7,5730 h60
  text "MIL" at 12987.46,5730 h60
  text "MIN. CLEARANCE:" at 11736.46,5598 h60
  text "0.2" at 12772.7,5598 h60
  text "mm" at 12987.46,5598 h60
  text "MIN. VIA PAD SIZE:" at 11736.46,5466 h60
  text "24" at 12802.71,5466 h60
  text "MIL" at 12987.46,5466 h60
  text "0.05mm (2MIL)" at 12431.46,5324.29 h60
  text "MINIMUM ANNULAR RING" at 11407.23,5320 h60
  text "EXTERNAL" at 13139.46,5320 h60
  text "PER" at 11607.23,5202 h60
  text "IPC-D-275 CLASS 2 LEVEL C" at 11827.23,5202 h60
  text "MIL, HOLES" at 13315.46,5089.71 h60
  text "+/-" at 12923,5089 h60
  text "+/-" at 13777,5089 h60
  text "REGISTRATION TOLERANCES:" at 11407.23,5084 h60
  text "METAL" at 12607,5084 h60
  text "5" at 13183.2,5084 h60
  text "3" at 14016.2,5084 h60
  text "MIL" at 14132.46,5084 h60
  text "MATERIAL:" at 11332.46,4874.54 h60
  text "FR-4 High Tg" at 12318.9,4734.21 h60
  text "FR-408" at 11753.46,4725.64 h60
  text "X" at 12165.46,4725.64 h60
  text "OTHER" at 13241.46,4725.64 h60
  text "62 MIL (1.6mm) +/-10%" at 12073.56,4562.92 h60
  text "THICKNESS:" at 11407.23,4558.64 h60
  text "X" at 11945.4,4558.64 h60
  text "OTHER" at 13358.46,4558.64 h60
  text "TOLERANCE:" at 11407.23,4400.64 h60
  text "X" at 12246.53,4400.64 h60
  text "ANSI IPC-6012 TYPE 3 CLASS 2" at 12433.48,4400.64 h60
  text "OTHER +/-" at 12433.46,4244.64 h60
  text "BOW & TWIST:" at 11407.23,4087.64 h60
  text "X" at 12246.53,4087.64 h60
  text "ANSI IPC-6012 TYPE 3 CLASS 2" at 12433.48,4087.64 h60
  text "OTHER +/-" at 12433.46,3929.13 h60
  text "DRILLING:" at 11332.46,3790.64 h60
  text "REFERENCE:" at 11407.23,3673.64 h60
  text "X" at 12055.46,3673.64 h60
  text "AS SHOWN" at 12242.46,3673.64 h60
  text "X" at 12956.46,3673.64 h60
  text "NC_DRILL FILES" at 13093.46,3673.64 h60
  text "PTH MIN COPPER THICKNESS:" at 11407.23,3515.64 h60
  text "X" at 12757.46,3515.64 h60
  text "1MIL" at 12894.46,3515.64 h60
  text "OTHER" at 13391.46,3515.64 h60
  text "BOARD FINISH:" at 11332.46,3356.64 h60
  text "SILKSCREEN:" at 11487.68,3238.64 h60
  text "X" at 12436.46,3238.64 h60
  text "TOP" at 12562.46,3238.64 h60
  text "X" at 12946.46,3238.64 h60
  text "BOTTOM" at 13073.46,3238.64 h60
  text "SILKSCREEN COLOR:" at 11487.68,3071.64 h60
  text "X" at 12435.42,3071.64 h60
  text "WHITE" at 12562.46,3071.64 h60
  text "OTHER" at 13073.46,3071.64 h60
  text "SOLDER RESIST COLOR:" at 11487.68,2901.64 h60
  text "X" at 12055.42,2742.44 h60
  text "GREEN" at 12182.46,2742.44 h60
  text "BLUE" at 12773.46,2742.44 h60
  text "OTHER" at 13311.46,2742.44 h60
  text "IMMERSION GOLD (ENIG)" at 12393.46,2553.92 h60
  text "ENEPIG" at 13731,2550.64 h60
  text "SURFACE FINISH:" at 11332.46,2549.64 h60
  text "X" at 12206.51,2549.64 h60
  text "IMM. TIN/SILVER OR EQUIV" at 11662,2392.64 h60
  text "OTHER" at 13093.46,2392.64 h60
  text "ARRAY/PANEL:" at 11332.46,2213.64 h60
  text "CUT AND TRIM PER MECH LAYER 1" at 12393.46,2209.35 h60
  text "N.C. ROUTE" at 12393.46,2057.64 h60
  text "X" at 13072.46,2057.64 h60
  text "V. SCORE" at 13259.46,2057.64 h60
  text "CERTIFICATION:" at 11332.46,1920.64 h60
  text "MATERIALS AND WORKMANSHIP FOR ALL PCBS" at 12057.46,1920.64 h60
  text "TO MEET OR EXCEED THE REQUIREMENTS OF:" at 12057.46,1822.64 h60
  text "X" at 11683.96,1686.13 h60
  text "ANSI IPC-A-600F CLASS ->" at 11822.96,1686.13 h60
  text "X" at 13462.02,1686.13 h60
  text "2" at 13580.96,1686.14 h60
  text "1" at 13265.96,1684.64 h60
  text "3" at 13934.96,1684.64 h60
  text "X" at 11686.02,1526.64 h60
  text "UL 94V-0" at 11822.96,1526.64 h60
  text "X" at 12498.02,1526.64 h60
  text "RoHS" at 12634.96,1526.64 h60
  text "OTHER" at 13279.36,1526.64 h60
  text "PER ORDER" at 13676.42,1526.64 h60
  text "ADDITIONAL REQUIREMENTS:" at 11332.46,1385.64 h60
  text "MICROSECTION:" at 11407.23,1270.64 h60
  text "YES" at 12312.96,1270.64 h60
  text "REQUIRED" at 13174.46,1114.49 h60
  text "BARE BOARD ELEC. TEST:" at 11407.23,1111.64 h60
  text "NONE" at 12712.96,1111.64 h60
  text "X" at 13047.46,1111.64 h60
  text "PER ORDER" at 13766.46,1111.64 h60
  text "MANUFACTURER'S UL:" at 11407.23,954.64 h60
  text "RAIL" at 12572.96,950.35 h60
  text "METAL" at 13064.77,950.35 h60
  text "X" at 13440,950 h60
  text "SILK" at 13576.46,950.35 h60
  text ".Layer_Name" at 577,-858.49 h60
M11 Gerber Information:
  lines w10: -292,-930.17 6308,-930.17 ; -292,-726.83 6310,-726.83 ; -292,-523.5 -292,-1133.5 3713,-1133.5 6310,-1133.5 6310,-523.5 -291.5,-523.5 -291.5,-1133.5 1284,-1133.5 ; 2173,-1133.5 2173,-523.5 ; 3440,-726.83 3440,-523.5 ; 4280,-726.83 4280,-523.5 ; 4902,-1140 4902,-937.17
  text "ALL ARTWORK VIEWED FROM TOP SIDE" at -228.5,-655.67 h60
  text "BOARD #:" at 2248,-655.67 h60
  text ".PRJ_Number" at 2793.5,-655.67 h60
  text "REV:" at 3638,-655.67 h60
  text ".PCB_Rev" at 3929.5,-655.67 h60
  text "SVN REV:" at 4476,-655.67 h60
  text ".VersionControl_RevNumber" at 4982,-655.67 h60
  text "LAYER NAME =" at -228.5,-858.49 h60
  text "TID #:" at 2248,-859 h60
  text ".TID" at 2793.5,-859 h60
  text "PLOT NAME =" at -228.5,-1064.34 h60
  text ".plot_File_Name" at 577,-1064.34 h60
  text "GENERATED    :" at 2250,-1064.34 h60
  text ".Print_Date" at 3119.5,-1064.34 h60
  text ".Print_Time" at 3848.5,-1064.34 h60
  text "TEXAS INSTRUMENTS" at 5113,-1064.34 h60
M12 Stackup:
  drawing of 191 lines, arcs and shapes, not listed
  text "Layer" at 9790.58,7830 h60
  text "Name" at 10200.49,7830 h60
  text "Material" at 11130.23,7830 h60
  text "Thickness" at 11990,7830 h60
  text "Constant" at 12639.84,7830 h60
  text "Board Layer Stack" at 13209.7,7830 h60
  text "1" at 9790.58,7710 h60
  text "Top Overlay" at 10200.49,7710 h60
  text "2" at 9790.58,7590 h60
  text "Top Solder" at 10200.49,7590 h60
  text "Solder Resist" at 11130.23,7590 h60
  text "0.40mil" at 11990,7590 h60
  text "3.5" at 12639.84,7590 h60
  text "3" at 9790.58,7470 h60
  text "Top Layer" at 10200.49,7470 h60
  text "Copper" at 11130.23,7470 h60
  text "1.40mil" at 11990,7470 h60
  text "4" at 9790.58,7350 h60
  text "Dielectric1" at 10200.49,7350 h60
  text "FR-4" at 11130.23,7350 h60
  text "59.20mil" at 11990,7350 h60
  text "4.8" at 12639.84,7350 h60
  text "5" at 9790.58,7230 h60
  text "Bottom Layer" at 10200.49,7230 h60
  text "Copper" at 11130.23,7230 h60
  text "1.40mil" at 11990,7230 h60
  text "6" at 9790.58,7110 h60
  text "Bottom Solder" at 10200.49,7110 h60
  text "Solder Resist" at 11130.23,7110 h60
  text "0.40mil" at 11990,7110 h60
  text "3.5" at 12639.84,7110 h60
  text "7" at 9790.58,6990 h60
  text "Bottom Overlay" at 10200.49,6990 h60
  text ".Layer_Name" at 577,-858.49 h60
M13 Component Bodies Top:
  text ".Layer_Name" at 577,-858.49 h60
M14 Component Bodies Bottom:
  text ".Layer_Name" at 577,-858.49 h60
M15 Courtyards Top:
  text ".Layer_Name" at 577,-858.49 h60
M16 Courtyards Bottom:
  text ".Layer_Name" at 577,-858.49 h60
Drill Drawing:
  text ".Layer_Name" at 577,-858.49 h60

## Dimensions
0,-400 to 1000,-400 on M2 Board Dimensions